# EAGLE board circuit-board (EAGLE 8.6.3)
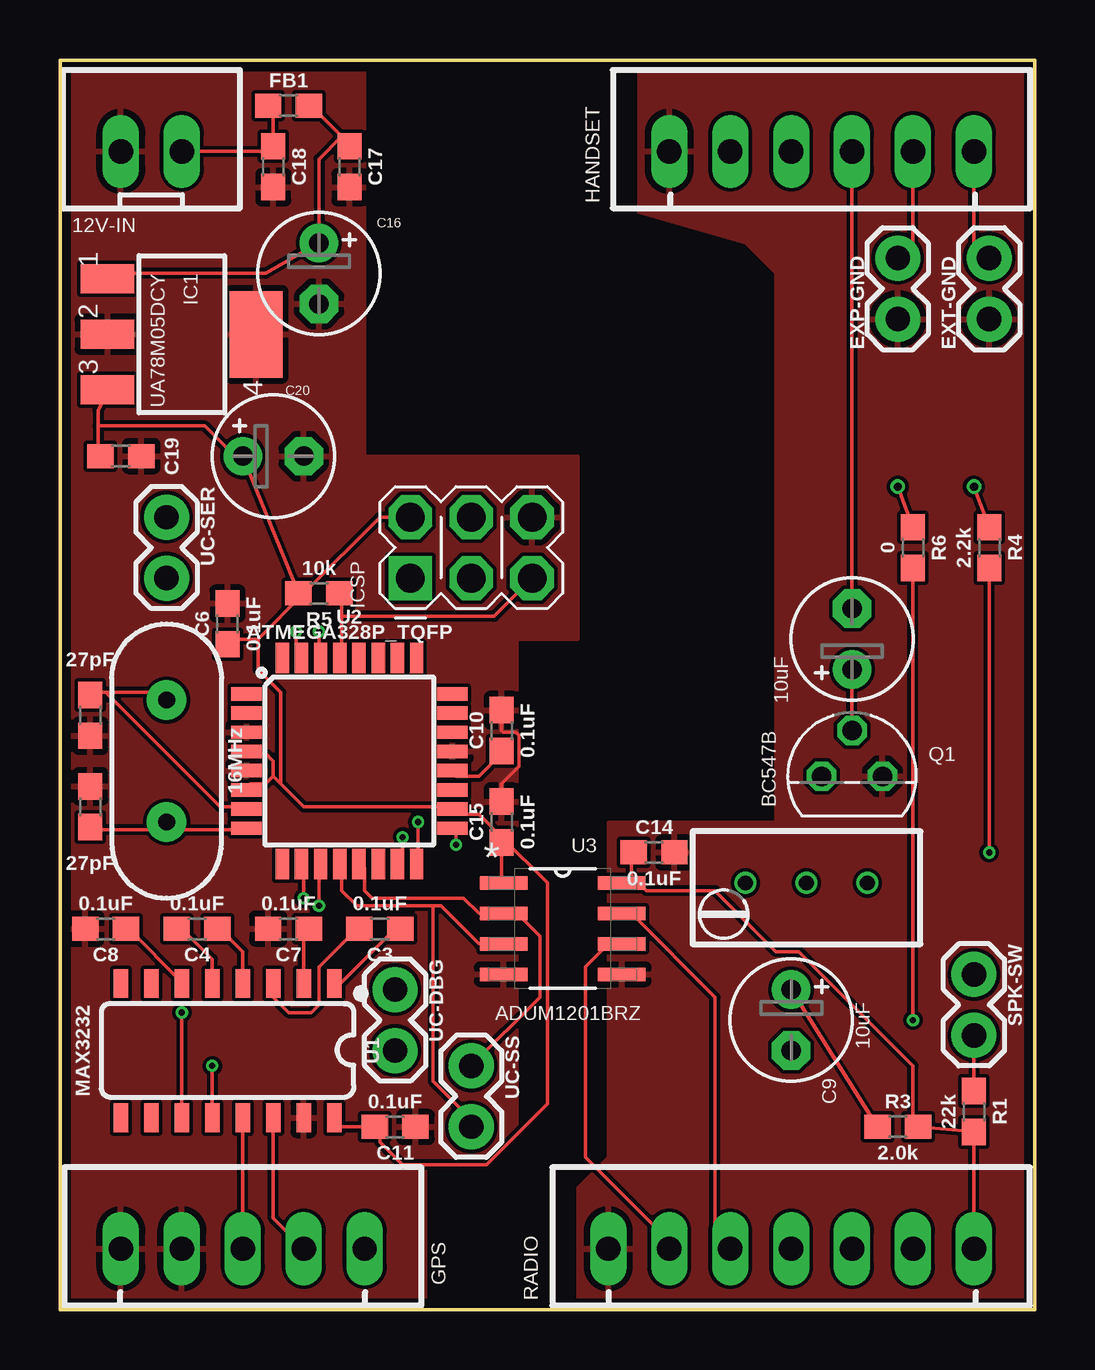
[diagram p0: board, top side]
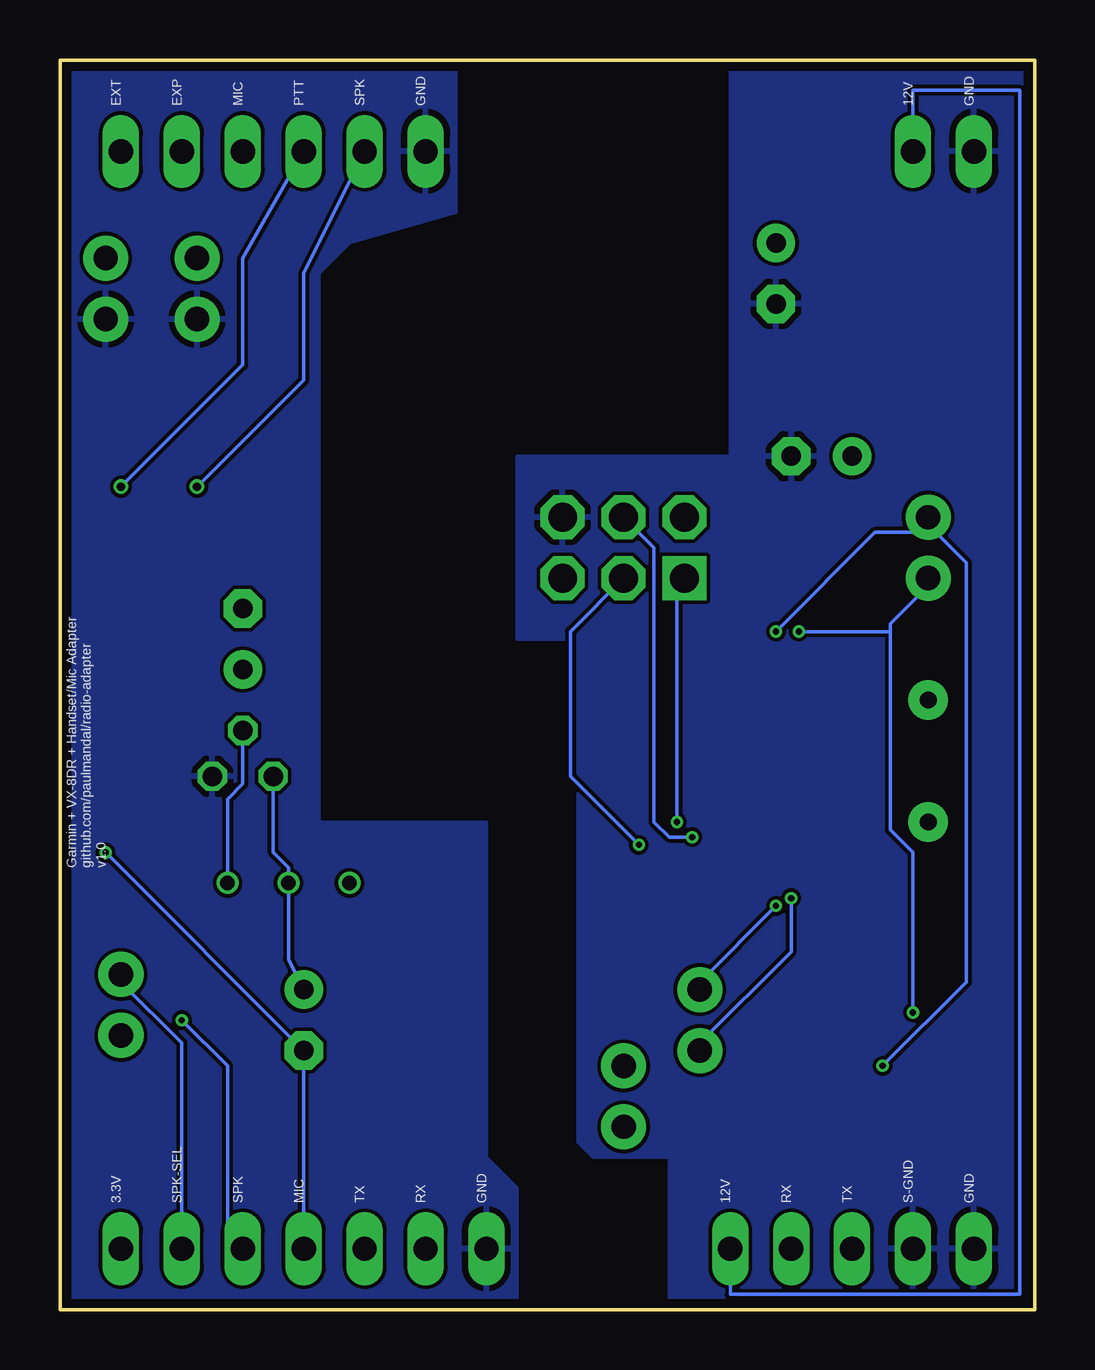
[diagram p1: board, bottom side, seen from below]

Size 40.64 x 52.07 mm. Coordinates in mm from the lower left corner, seen from the top.
Outline: 0,52.07 40.64,52.07 40.64,0 0,0 0,52.07
Copper layers (1*16): Top 0.035559375mm / dielectric 1.6mm / Bottom 0.035559375mm
Design rules "oshpark-2layer": minimum track width 6mil, minimum drill 10mil, track to track 6mil, track to pad 6mil, pad to pad 6mil, via to via 6mil, smd to smd 6mil, copper to edge 15mil, drill to drill 6mil, minimum pad ring 5mil, minimum via ring 5mil, stop-mask expansion 2.5mil, vias tented up to drill 0mil, thermal gap 10mil

## Footprints (pad centres in the part's own frame; a part is rotated, then mirrored left to right if it is on the bottom)
JST-XH-02-PACKAGE-LONG-PAD = drill 1.016 long: 1 -1.27,0; 2 1.27,0
0603 = smd 1.1 x 1: 1 -0.85,0; 2 0.85,0
E2,5-5 = drill 0.813 pad 1.6: + -1.27,0 | drill 0.813 pad 1.6 octagon: - 1.27,0
1X02 = drill 1.016 pad 1.88: 1 0,0; 2 2.54,0
JST-XH-05-PACKAGE-LONG-PAD = drill 1.016 long: 1 -5.08,0; 2 -2.54,0; 3 0,0; 4 2.54,0; 5 5.08,0
JST-XH-06-PACKAGE-LONG-PAD = drill 1.016 long: 1 -6.35,0; 2 -3.81,0; 3 -1.27,0; 4 1.27,0; 5 3.81,0; 6 6.35,0
SOT223 = smd 1.219 x 2.235: 1 -2.311,-3.099; 2 0,-3.099; 3 2.311,-3.099 | smd 3.6 x 2.2: 4 0,3.099
CONN-2X03 = drill 1.2 pad 1.829 square: 1 0,0 | drill 1.2 pad 1.829 octagon: 2 2.54,0; 3 0,-2.54; 4 2.54,-2.54; 5 0,-5.08; 6 2.54,-5.08
TO92 = drill 0.813 octagon: 1 1.27,0; 2 0,1.905; 3 -1.27,0
RTRIMT93YA = drill 0.61: 1 0,-2.54; 2 0,0; 3 0,2.54
JST-XH-07-PACKAGE-LONG-PAD = drill 1.016 long: 1 -7.62,0; 2 -5.08,0; 3 -2.54,0; 4 0,0; 5 2.54,0; 6 5.08,0; 7 7.62,0
SO16 = smd 0.6 x 1.2: 1 -4.445,-2.8; 2 -3.175,-2.8; 3 -1.905,-2.8; 4 -0.635,-2.8; 5 0.635,-2.8; 6 1.905,-2.8; 7 3.175,-2.8; 8 4.445,-2.8; 9 4.445,2.8; 10 3.175,2.8; 11 1.905,2.8; 12 0.635,2.8; 13 -0.635,2.8; 14 -1.905,2.8; 15 -3.175,2.8; 16 -4.445,2.8
TQFP32-08 = smd 1.27 x 0.559: 1 -4.293,2.8; 2 -4.293,2; 3 -4.293,1.2; 4 -4.293,0.4; 5 -4.293,-0.4; 6 -4.293,-1.2; 7 -4.293,-2; 8 -4.293,-2.8; 17 4.293,-2.8; 18 4.293,-2; 19 4.293,-1.2; 20 4.293,-0.4; 21 4.293,0.4; 22 4.293,1.2; 23 4.293,2; 24 4.293,2.8 | smd 0.559 x 1.27: 9 -2.8,-4.293; 10 -2,-4.293; 11 -1.2,-4.293; 12 -0.4,-4.293; 13 0.4,-4.293; 14 1.2,-4.293; 15 2,-4.293; 16 2.8,-4.293; 25 2.8,4.293; 26 2,4.293; 27 1.2,4.293; 28 0.4,4.293; 29 -0.4,4.293; 30 -1.2,4.293; 31 -2,4.293; 32 -2.8,4.293
SOIC127P600X175-8N = smd 1.981 x 0.559: 1 -2.464,1.905; 2 -2.464,0.635; 3 -2.464,-0.635; 4 -2.464,-1.905; 5 2.464,-1.905; 6 2.464,-0.635; 7 2.464,0.635; 8 2.464,1.905
HC49US = drill 0.7 pad 1.651: 1 -2.54,0; 2 2.54,0

## Placement (x,y rotation side)
12V-IN  JST-XH-02-PIN-LONG-PAD  [JST-XH-02-PACKAGE-LONG-PAD]  3.81,48.26 0 top
C3  0.1uF  [0603]  13.34,15.87 180 top
C4  0.1uF  [0603]  5.71,15.87 180 top
C5  10uF  [E2,5-5]  33.02,27.94 90 top
C6  0.1uF  [0603]  6.99,28.57 90 top
C7  0.1uF  [0603]  9.53,15.87 180 top
C8  0.1uF  [0603]  1.91,15.87 180 top
C9  10uF  [E2,5-5]  30.48,12.07 270 top
C10  0.1uF  [0603]  18.41,24.13 90 top
C11  0.1uF  [0603]  13.97,7.62 180 top
C12  27pF  [0603]  1.27,24.76 90 top
C13  27pF  [0603]  1.27,20.96 270 top
C14  0.1uF  [0603]  24.76,19.05 0 top
C15  0.1uF  [0603]  18.41,20.32 90 top
C16  10uF  [E2,5-5]  10.79,43.18 270 top
C17  0.1uF  [0603]  12.06,47.62 270 top
C18  10nF  [0603]  8.89,47.62 270 top
C19  0.1uF  [0603]  2.54,35.56 0 top
C20  10uF  [E2,5-5]  8.89,35.56 0 top
EXP-GND  [1X02]  34.93,41.28 90 top
EXT-GND  [1X02]  38.73,41.28 90 top
FB1  30Ω/1.8A  [0603]  9.53,50.17 0 top
GPS  JST-XH-05-PIN-LONG-PAD  [JST-XH-05-PACKAGE-LONG-PAD]  7.62,2.54 0 top
HANDSET  JST-XH-06-PIN-LONG-PAD  [JST-XH-06-PACKAGE-LONG-PAD]  31.75,48.26 0 top
IC1  UA78M05DCY  [SOT223]  5.08,40.64 270 top
ICSP  [CONN-2X03]  14.61,30.48 90 top
Q1  BC547B  [TO92]  33.02,22.22 0 top
R1  22k  [0603]  38.1,8.25 270 top
R2  10k  [RTRIMT93YA]  31.11,17.78 90 top
R3  2.0k  [0603]  34.93,7.62 0 top
R4  2.2k  [0603]  38.73,31.75 270 top
R5  10k  [0603]  10.79,29.84 180 top
R6  0  [0603]  35.56,31.75 270 top
RADIO  JST-XH-07-PIN-LONG-PAD  [JST-XH-07-PACKAGE-LONG-PAD]  30.48,2.54 0 top
SPK-SW  [1X02]  38.1,13.97 270 top
U1  MAX3232  [SO16]  6.99,10.79 180 top
U2  ATMEGA328P_TQFP  [TQFP32-08]  12.06,22.86 0 top
U3  ADUM1201BRZ  [SOIC127P600X175-8N]  20.95,15.87 0 top
UC-DBG  [1X02]  13.97,13.33 270 top
UC-SER  [1X02]  4.45,33.02 270 top
UC-SS  [1X02]  17.14,10.16 270 top
Y1  16MHz  [HC49US]  4.45,22.86 90 top

## Library data of the parts
12V-IN GPS HANDSET RADIO = Rembrandt Electronics - JST XH Connectors v1-0
C3 C4 C6-C8 C10 C11 C14 C15 C17 C19 = SparkFun-Capacitors; PROD_ID: CAP-08604
C5 C9 C16 C20 = adafruit
C12 C13 = SparkFun-Capacitors; PROD_ID: CAP-09989
C18 = SparkFun-Capacitors; PROD_ID: CAP-00867
EXP-GND EXT-GND SPK-SW UC-DBG UC-SER UC-SS = SparkFun-Connectors
FB1 = SparkFun-Coils; PROD_ID: NDUC-07859
IC1 = linear
ICSP = arduino_jw
Q1 = transistor-npn
R1 = SparkFun-Resistors; PROD_ID: RES-07853
R2 = resistor
R3 = SparkFun-Resistors; PROD_ID: RES-08296
R4 = SparkFun-Resistors; PROD_ID: RES-08272
R5 = SparkFun-Resistors; PROD_ID: RES-00824
R6 = SparkFun-Resistors; PROD_ID: RES-08609
U1 = SparkFun-IC-Comms; PROD_ID: IC-08171
U2 = SparkFun-IC-Microcontroller; PROD_ID: IC-09069
U3 = Analog Devices_By_element14_Batch_1; MPN: ADUM1201BRZ; OC_FARNELL: 1078201; OC_NEWARK: 19M8748; PACKAGE: SOIC-8; SUPPLIER: Analog Devices
Y1 = SparkFun-Clocks; PROD_ID: XTAL-08181; SF_ID: COM-00536

## Nets
3.3V: C14.1 R1.2 R3.2 RADIO.7 U3.8
12V: 12V-IN.2 C18.1 FB1.1 GPS.5
+5V: C6.1 C11.2 C15.1 C19.1 C20.+ IC1.3 ICSP.2 R5.2 U1.16 U2.4 U2.6 U2.18 U3.1
GND: C14.2 EXP-GND.1 EXT-GND.1 HANDSET.1 Q1.1 RADIO.1 U3.5
GNDA: 12V-IN.1 C6.2 C7.2 C8.2 C10.2 C11.1 C12.1 C13.1 C15.2 C16.- C17.2 C18.2 C19.2 C20.- GPS.1 GPS.2 IC1.2 IC1.4 ICSP.6 U1.15 U2.3 U2.5 U2.21 U3.4
GPS-RX: GPS.4 U1.14
GPS-TX: GPS.3 U1.13
HANDSET-EXP: EXP-GND.2 HANDSET.5
HANDSET-EXT: EXT-GND.2 HANDSET.6
HANDSET-MIC: C5.- HANDSET.4
HANDSET-PTT: HANDSET.3 R4.1
HANDSET-SPK: HANDSET.2 R6.1
N$1: C16.+ C17.1 FB1.2 IC1.1
N$3: C9.+ Q1.3 R2.2 R3.1
N$4: C5.+ Q1.2 R2.1
N$12: R1.1 SPK-SW.2
N$15: C3.2 U1.3
N$16: C3.1 U1.1
N$17: C4.2 U1.5
N$18: C4.1 U1.4
N$20: C7.1 U1.2
N$21: C8.1 U1.6
N$22: C10.1 U2.20
N$23: C12.2 U2.7 Y1.2
N$24: C13.2 U2.8 Y1.1
RADIO-MIC/PTT: C9.- R4.2 RADIO.4
RADIO-RX: RADIO.2 U3.6
RADIO-SPK-OUT: R6.2 RADIO.5
RADIO-SPK-SEL: RADIO.6 SPK-SW.1
RADIO-TX: RADIO.3 U3.7
UC-DBG-RX: U2.11 UC-DBG.1
UC-DBG-TX: U2.10 UC-DBG.2
UC-MISO: ICSP.1 U2.16
UC-MOSI: ICSP.4 U2.15
UC-RESET: ICSP.5 R5.1 U2.29
UC-RX: U1.12 U2.30 UC-SER.1
UC-SCK: ICSP.3 U2.17
UC-SS-RX: U2.13 U3.2 UC-SS.1
UC-SS-TX: U2.12 U3.3 UC-SS.2
UC-TX: U1.11 U2.31 UC-SER.2

## Tracks (layer width: path | path; a pad name or v marks a point on that pad's centre or on a via)
3.3V
  Top 0.152: RADIO.7 R1.2 R3.2 35.56,7.62 35.56,10.16 30.8,14.92 29.84,14.92 27.3,17.46 24.45,17.46 23.81,18.1 | 23.81,18.1 23.81,19.05 C14.1 | 23.81,18.1 23.49,17.78 U3.8
12V
  Top 0.152: FB1.1 8.89,50.17 C18.1 8.89,48.26 12V-IN.2
  Bottom 0.152: GPS.5 12.7,0.63 0.64,0.63 0.64,50.8 5.08,50.8 12V-IN.2
+5V
  Top 0.152: 8.26,27.94 6.99,27.94 C6.1 | 10.16,29.84 8.26,27.94 | 10.16,29.84 13.34,33.02 ICSP.2 | 10.16,29.84 R5.2 C20.+ 7.3,35.56 6.03,36.83 1.59,36.83 | 8.89,22.22 8.57,21.91 7.94,21.91 U2.6 | 8.89,22.22 8.89,22.86 8.57,23.18 7.94,23.18 U2.4 | 8.89,22.22 9.21,21.91 | 9.21,21.91 10.16,20.96 16.19,20.96 U2.18 16.51,20.64 17.46,20.64 18.41,19.68 | U1.16 11.43,7.94 11.75,7.62 C11.2 13.34,7.62 13.34,6.98 14.29,6.03 17.78,6.03 20.32,8.57 20.32,17.78 18.41,19.68 | U3.1 18.41,17.78 C15.1 18.41,19.68 | 8.26,27.94 8.26,26.67 9.21,25.72 9.21,21.91 | 1.59,36.83 1.59,37.47 IC1.3 1.59,38.1 1.27,38.42 | 1.59,36.83 1.59,35.56 C19.1
GND
  pour Bottom: 40.64,52.07 40.64,0 21.59,0 21.59,5.08 22.86,6.35 22.86,20.32 29.84,20.32 29.84,43.18 28.57,44.45 24.13,45.72 24.13,52.07
  pour Top: 40.64,52.07 40.64,0 21.59,0 21.59,5.08 22.86,6.35 22.86,20.32 29.84,20.32 29.84,43.18 28.57,44.45 24.13,45.72 24.13,52.07
GNDA
  Top 0.152: 18.41,20.96 C15.2 18.41,21.91 19.14,22.64 19.14,23.93 19.01,24.06 18.49,24.06 18.41,24.13 C10.2
  pour Bottom: 0,52.07 0,0 15.24,0 15.24,6.35 18.41,6.35 19.05,6.98 19.05,27.94 21.59,27.94 21.59,35.56 12.7,35.56 12.7,52.07
  pour Top: 0,52.07 0,0 15.24,0 15.24,6.35 18.41,6.35 19.05,6.98 19.05,27.94 21.59,27.94 21.59,35.56 12.7,35.56 12.7,52.07
GPS-RX
  Top 0.152: U1.14 8.89,3.81 GPS.4
GPS-TX
  Top 0.152: GPS.3 U1.13
HANDSET-EXP
  Top 0.152: HANDSET.5 35.56,44.45 EXP-GND.2
HANDSET-EXT
  Top 0.152: HANDSET.6 38.1,44.45 EXT-GND.2
HANDSET-MIC
  Top 0.152: HANDSET.4 C5.-
HANDSET-PTT  (via drill 0.35)
  Top 0.152: R4.1 v38.1,34.29
  Bottom 0.152: HANDSET.3 33.02,43.81 33.02,39.37 v38.1,34.29
HANDSET-SPK  (via drill 0.35)
  Top 0.152: v34.93,34.29 R6.1
  Bottom 0.152: HANDSET.2 30.48,43.18 30.48,38.73 v34.93,34.29
N$1
  Top 0.152: 11.75,48.89 12.06,48.58 C17.1 11.75,48.89 | 11.75,48.89 10.48,50.17 FB1.2 | 11.75,48.89 10.79,47.94 C16.+ 8.57,43.18 2.54,43.18 IC1.1
N$3
  Top 0.152: R3.1 C9.+
  Bottom 0.152: C9.+ 31.11,14.61 R2.2 31.11,18.41 31.75,19.05 Q1.3
N$4
  Top 0.152: Q1.2 C5.+
  Bottom 0.152: R2.1 33.66,21.27 33.02,21.91 Q1.2
N$12
  Top 0.152: SPK-SW.2 R1.1
N$15
  Top 0.152: U1.3 8.89,13.02 9.53,12.38 10.48,12.38 10.79,12.7 10.79,14.29 12.38,15.87 C3.2
N$16
  Top 0.152: C3.1 13.97,15.87 11.43,13.33 U1.1
N$17
  Top 0.152: U1.5 6.35,14.61 5.08,15.87 C4.2
N$18
  Top 0.152: U1.4 7.62,14.92 6.67,15.87 C4.1
N$20
  Top 0.152: U1.2 10.16,15.87 C7.1
N$21
  Top 0.152: C8.1 2.86,15.87 5.08,13.65 U1.6
N$22
  Top 0.152: C10.1 18.41,23.18 17.46,22.22 16.51,22.22 U2.20
N$23
  Top 0.152: 1.91,25.72 4.13,25.72 Y1.2 | 1.91,25.72 1.27,25.72 C12.2 | 1.91,25.72 6.67,20.96 7.62,20.96 U2.7
N$24
  Top 0.152: 4.13,20 1.27,20 C13.2 | 4.13,20 7.62,20 U2.8 | 4.13,20 Y1.1
RADIO-MIC/PTT  (via drill 0.25)
  Top 0.152: v38.73,19.05 R4.2
  Bottom 0.152: RADIO.4 C9.- v38.73,19.05
RADIO-RX
  Top 0.152: U3.6 22.86,15.24 21.91,14.29 21.91,6.35 25.4,2.86 RADIO.2
RADIO-SPK-OUT  (via drill 0.25)
  Top 0.152: v35.56,12.07 R6.2
  Bottom 0.152: v35.56,12.07 33.66,10.16 33.66,3.17 RADIO.5
RADIO-SPK-SEL
  Bottom 0.152: RADIO.6 35.56,11.11 38.1,13.65 SPK-SW.1
RADIO-TX
  Top 0.152: U3.7 23.81,16.51 27.3,13.02 27.3,3.17 RADIO.3
UC-DBG-RX  (via drill 0.25)
  Top 0.152: v10.79,16.83 10.79,18.41 U2.11
  Bottom 0.152: v10.79,16.83 13.97,13.65 UC-DBG.1
UC-DBG-TX  (via drill 0.25)
  Top 0.152: v10.16,17.14 10.16,18.41 U2.10
  Bottom 0.152: v10.16,17.14 10.16,14.92 13.97,11.11 UC-DBG.2
UC-MISO  (via drill 0.25)
  Top 0.152: v14.92,20.32 14.92,18.73 U2.16
  Bottom 0.152: v14.92,20.32 14.92,30.16 ICSP.1
UC-MOSI  (via drill 0.25)
  Top 0.152: v14.29,19.68 14.29,18.73 U2.15
  Bottom 0.152: v14.29,19.68 15.24,19.68 15.88,20.32 15.88,31.75 ICSP.4
UC-RESET
  Top 0.152: 11.75,28.89 11.75,27.3 U2.29 | 11.75,28.89 11.75,29.84 R5.1 | 11.75,28.89 18.1,28.89 ICSP.5
UC-RX  (via drill 0.25)
  Top 0.152: v6.35,10.16 U1.12 | v10.79,28.26 10.79,27.3 U2.30
  Bottom 0.152: v6.35,10.16 2.86,13.65 2.86,31.11 4.13,32.39 | 4.13,32.39 4.45,32.7 UC-SER.1 4.13,32.39 | v10.79,28.26 6.67,32.39 4.13,32.39
UC-SCK  (via drill 0.25)
  Top 0.152: v16.51,19.37 16.51,20 U2.17
  Bottom 0.152: v16.51,19.37 18.26,21.11 19.37,22.22 19.37,28.26 ICSP.3
UC-SS-RX
  Top 0.152: U2.13 12.7,18.41 12.7,17.46 13.02,17.14 16.83,17.14 17.46,16.51 U3.2 19.05,16.51 20,15.56 20,13.02 UC-SS.1
UC-SS-TX
  Top 0.152: 15.56,16.83 15.88,16.83 17.46,15.24 U3.3 | 15.56,16.83 12.38,16.83 11.75,17.46 11.75,18.41 U2.12 | UC-SS.2 17.14,7.94 15.56,9.53 15.56,16.83
UC-TX  (via drill 0.25)
  Top 0.152: v5.08,12.38 U1.11 | v9.84,28.26 9.84,27.3 U2.31
  Bottom 0.152: v5.08,12.38 5.08,19.05 6.03,20 6.03,28.26 | 6.03,28.26 6.03,28.57 4.45,30.16 UC-SER.2 | 6.03,28.26 v9.84,28.26

## Text on the board
bPlace: GND | 12V | GND | SPK | PTT | MIC | EXP | EXT | Garmin + VX-8DR + Handset/Mic Adapter / github.com/paulmandal/radio-adapter / v1.0 | GND | S-GND | TX | RX | 12V | GND | RX | TX | MIC | SPK | SPK-SEL | 3.3V